# Altium PCB FLATSAT BCR.PcbDoc (part 1 of 3)
Units mm, origin at the board's own origin, x right, y up, seen from the top; angles counter-clockwise.
Board outline 180 x 90 mm, 4 copper layers (Top Layer, Internal Plane 1, Internal Plane 2, Bottom Layer); 220 components, 140 nets, 843 pads, 517 vias.
Unrouted connection lines stored in the file: 2.
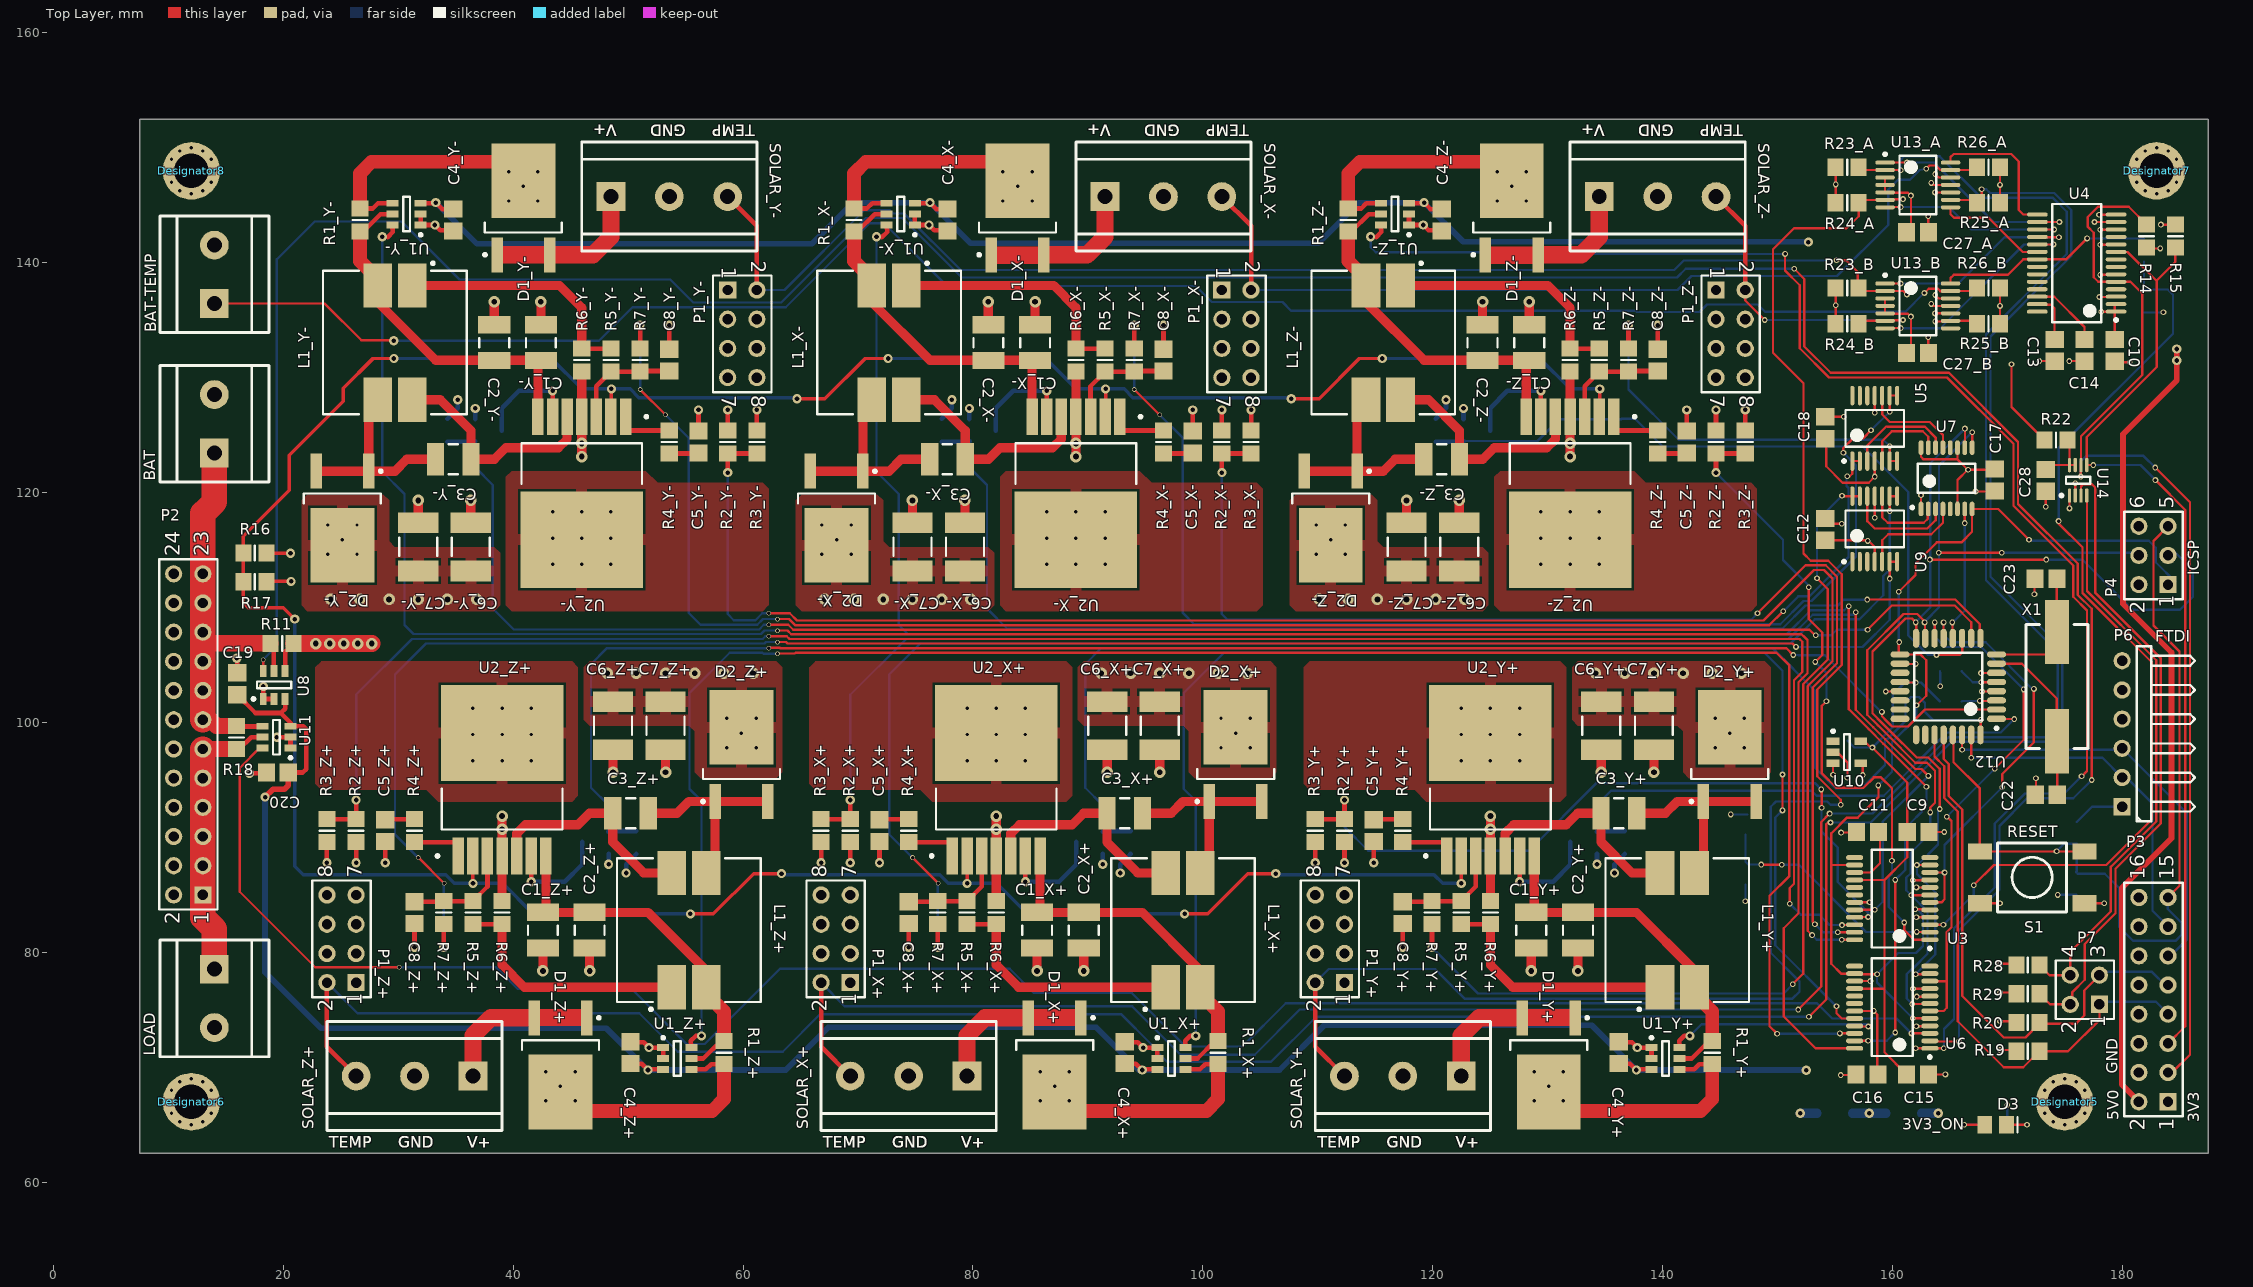
[diagram p0: Top Layer view]
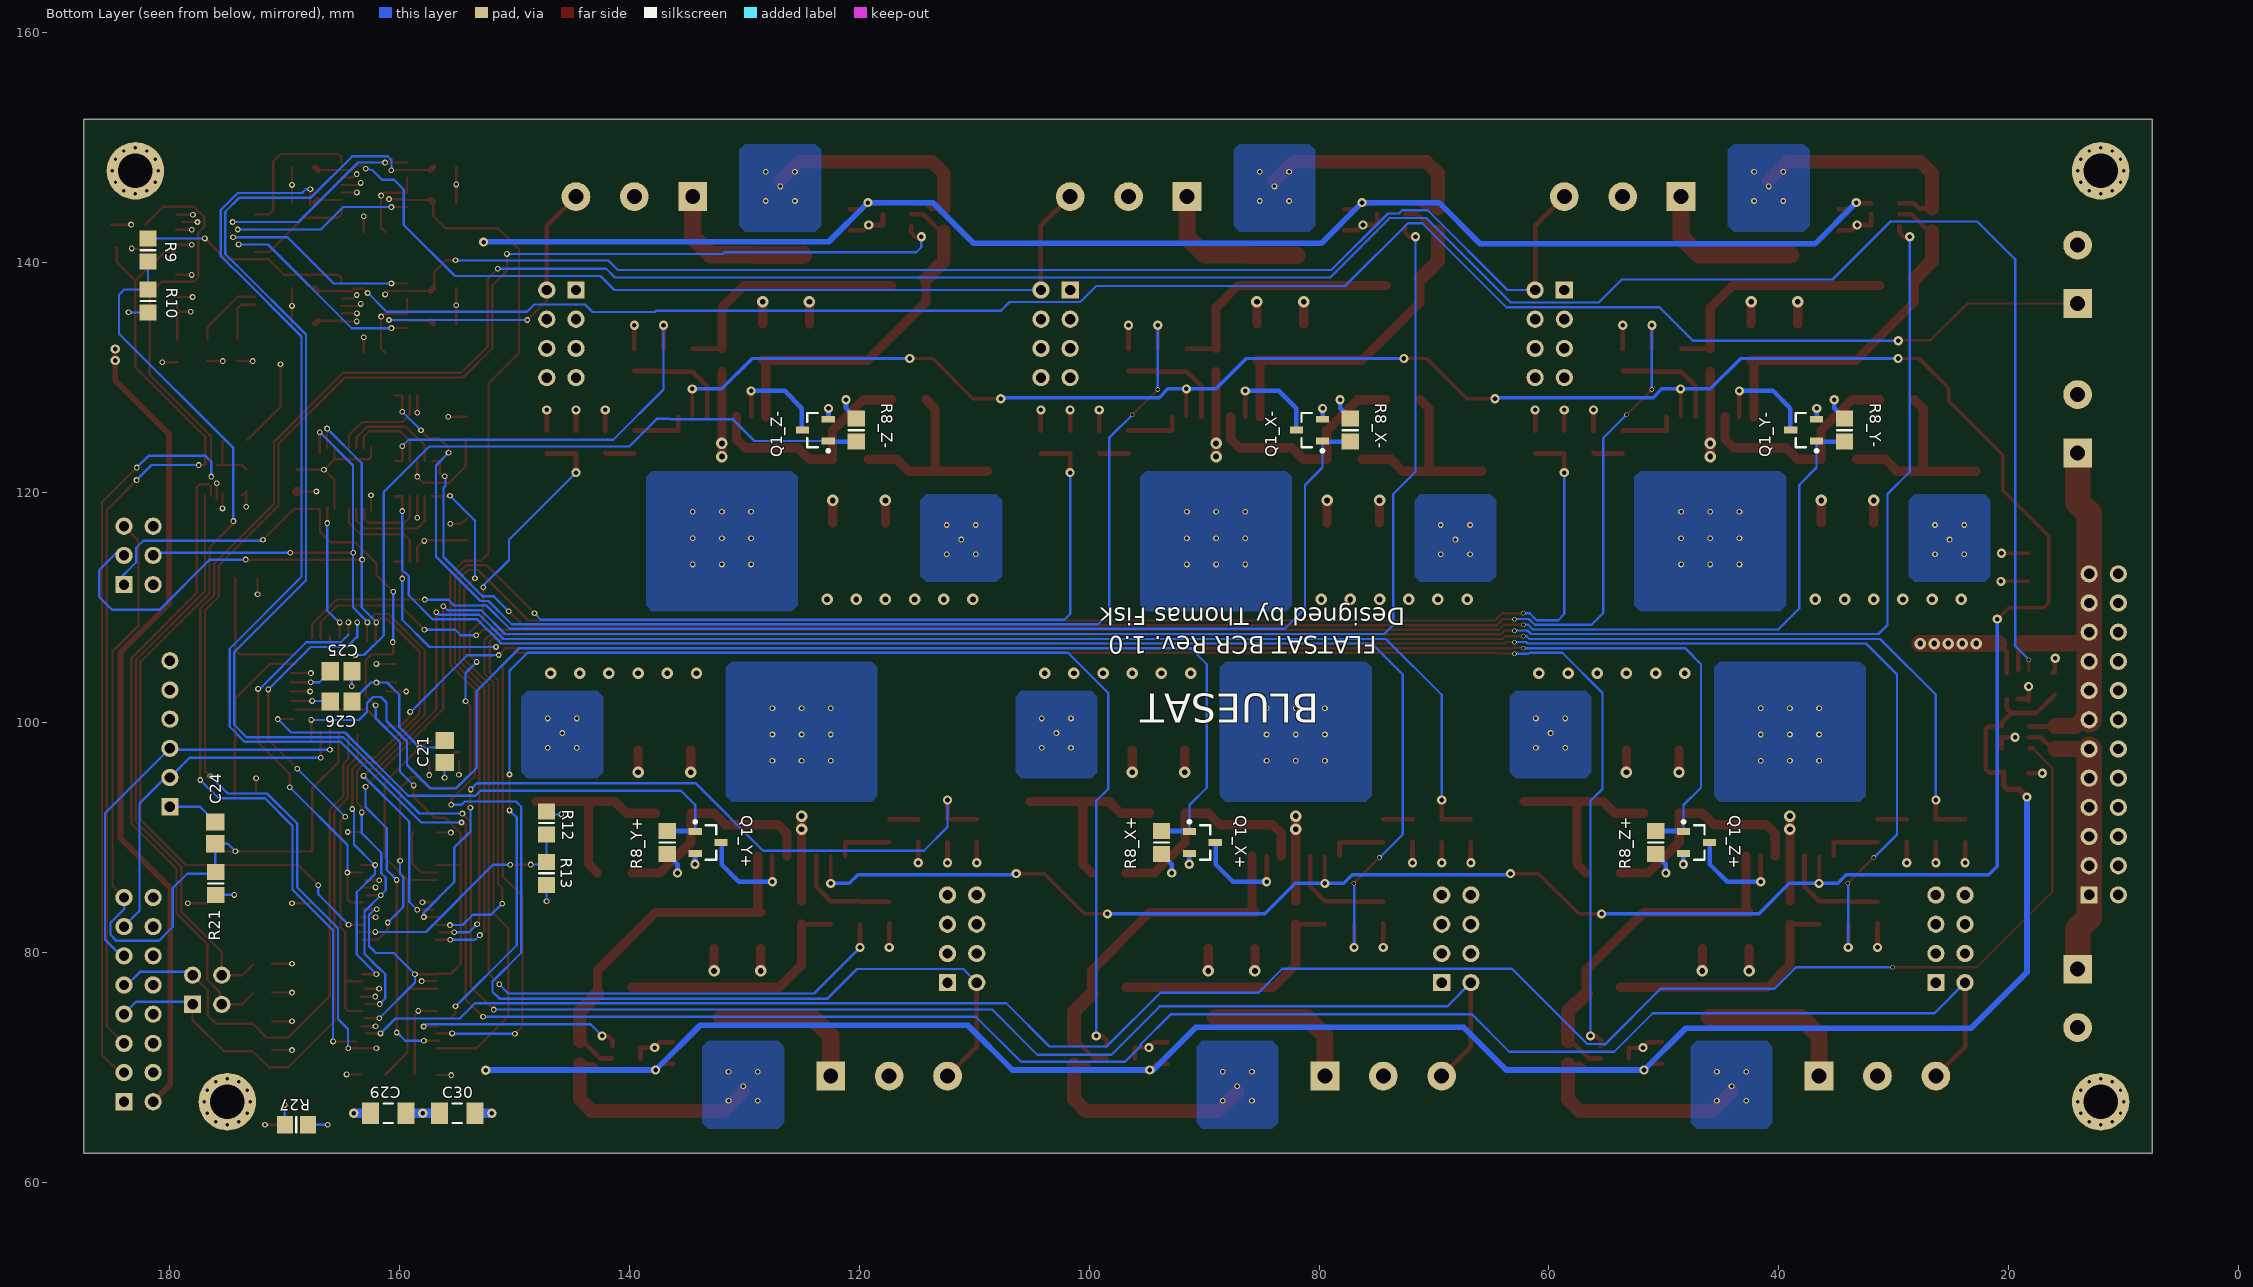
[diagram p1: Bottom Layer view, seen from below]
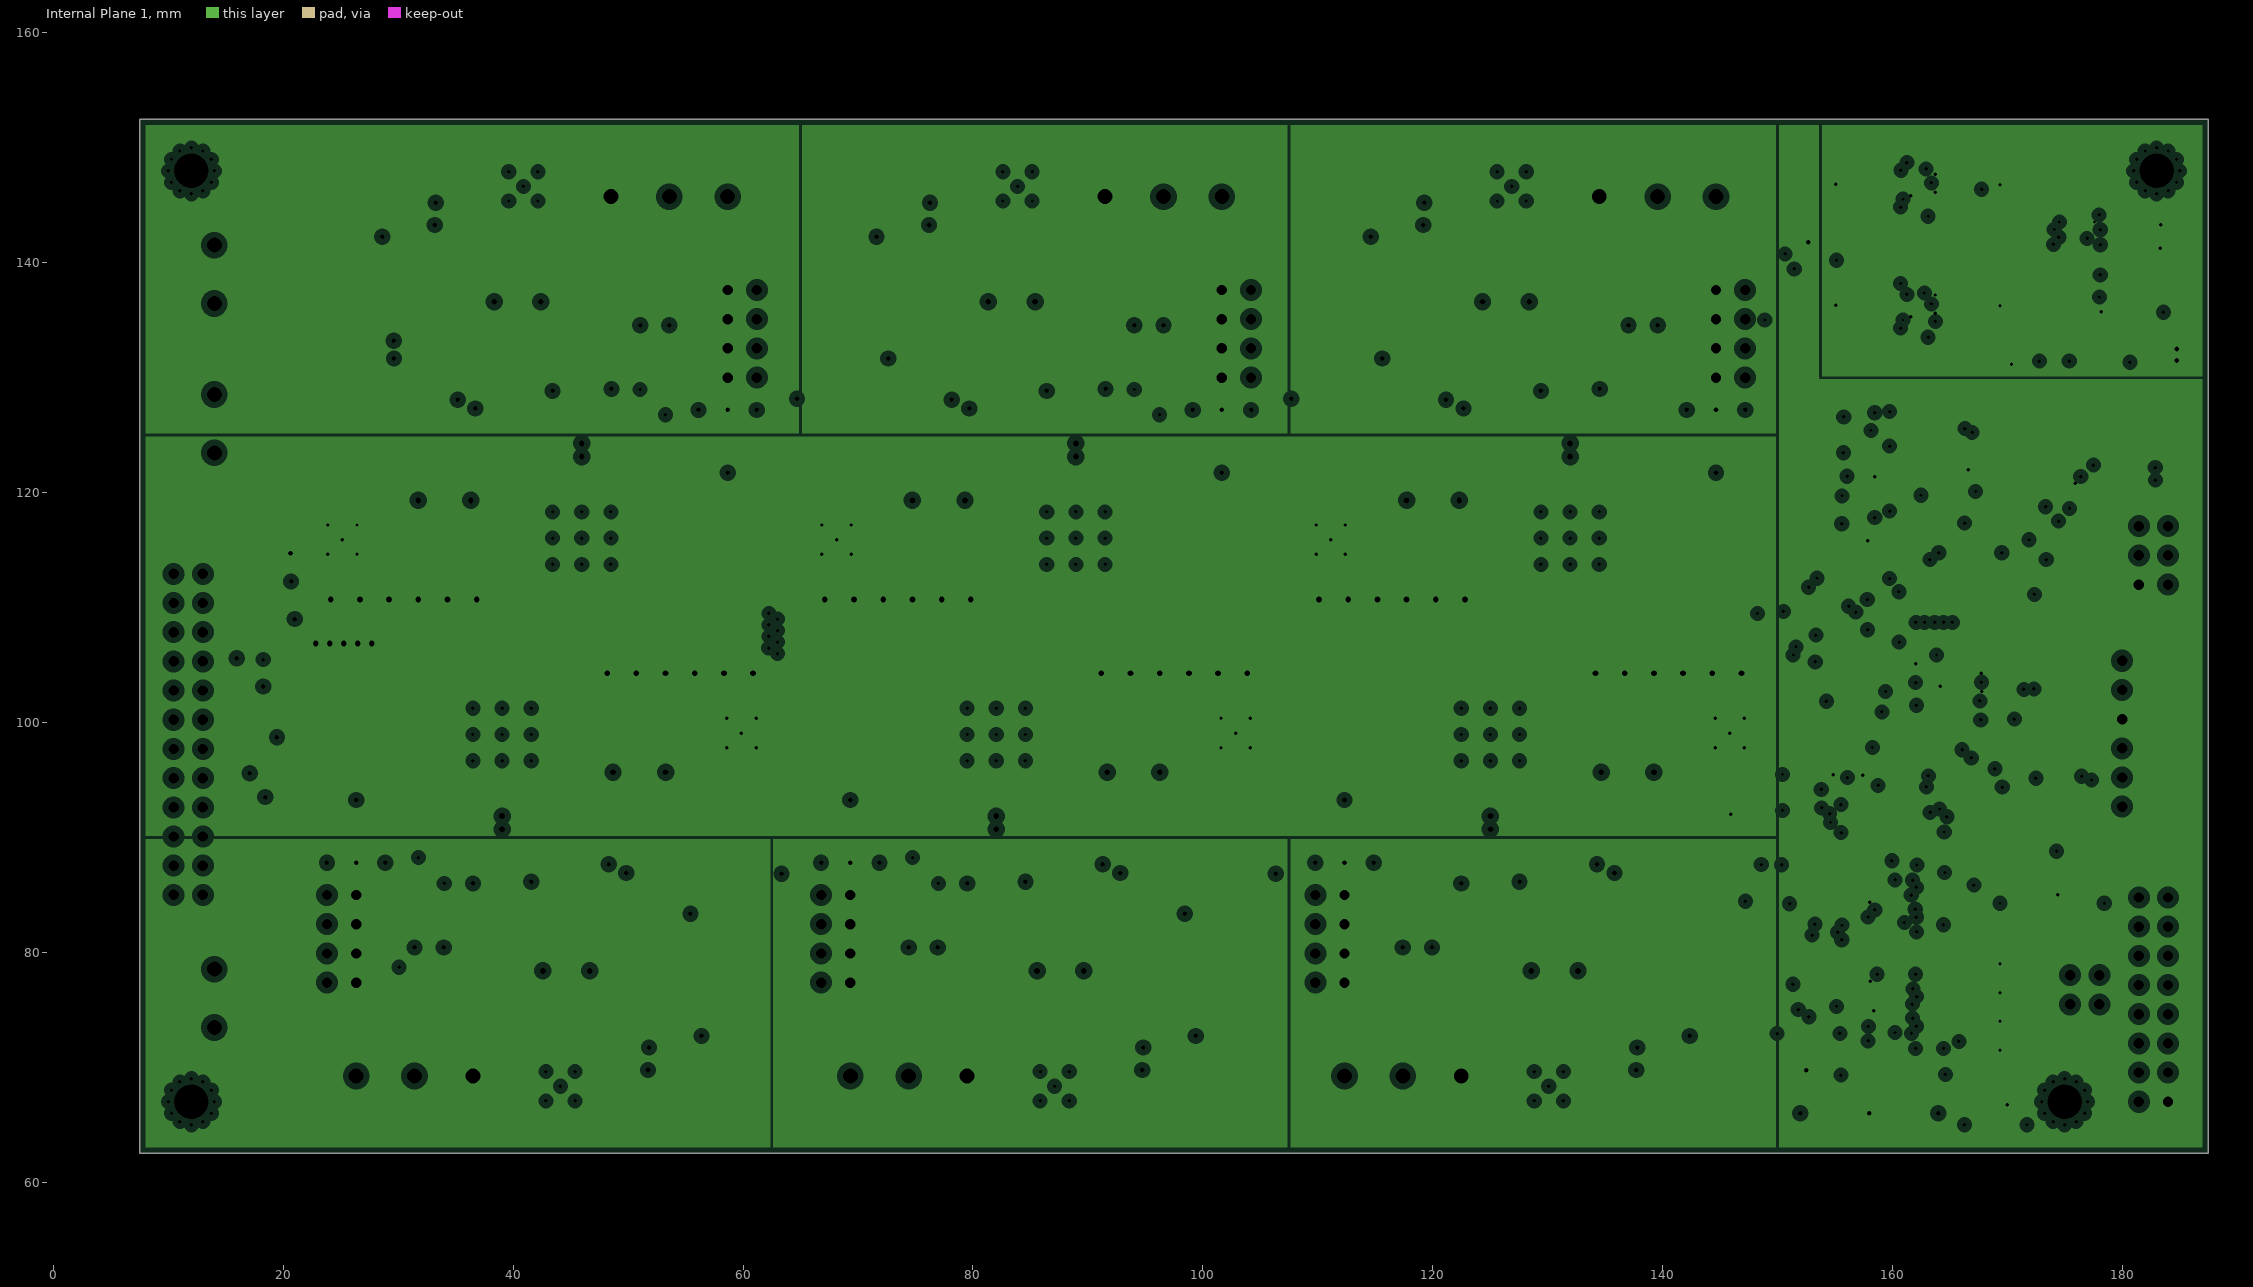
[diagram p2: Internal Plane 1, clearances drawn from the general rule]
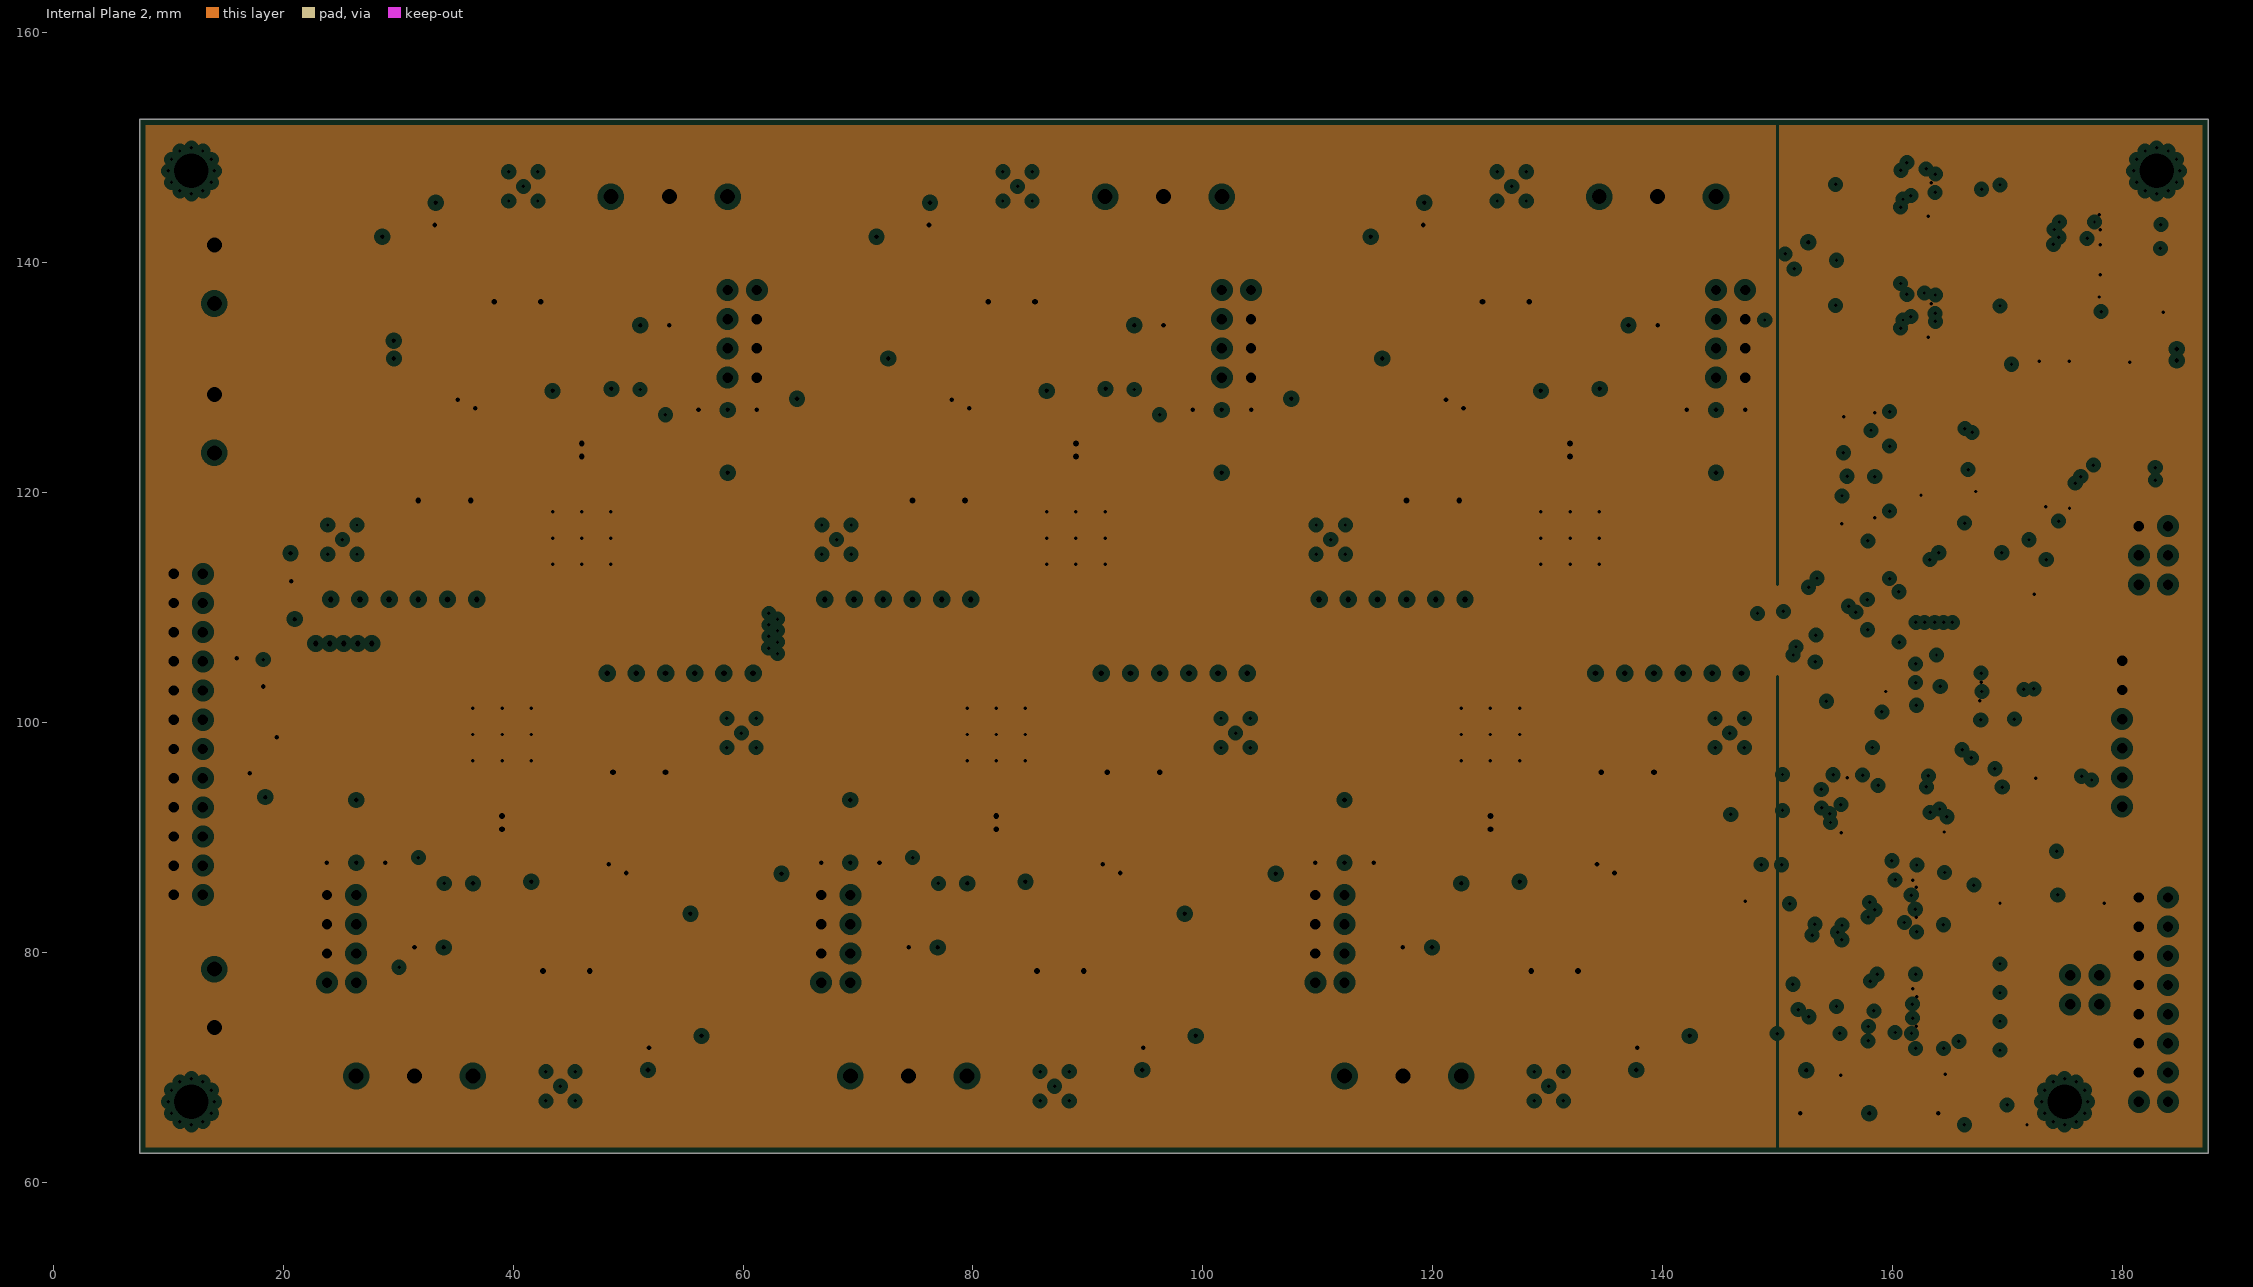
[diagram p3: Internal Plane 2, clearances drawn from the general rule]

## Layer stack, top to bottom
Top Layer: signal copper 0.0356
Dielectric: dielectric 0.32, FR-4, Dk 4.8
Internal Plane 1: plane copper 0.0356, net (Multiple Nets)
Dielectric: dielectric 0.32, FR-4, Dk 4.8
Internal Plane 2: plane copper 0.0356, net GND
Dielectric: dielectric 0.32, FR-4, Dk 4.8
Bottom Layer: signal copper 0.0356

## Board outline
7.5,62.5 187.5,62.5 187.5,152.5 7.5,152.5

## Design rules (kind name [scope] priority, off if disabled: settings)
AssemblyTestPointUsage [All] p1 off:
AssemblyTestpoint [All] p1 off: testpointundercomponent=TRUE minsize=1.016 maxsize=2.54 preferedsize=1.524 minholesize=0 maxholesize=1.016 preferedholesize=0.813 testpointgrid=0.025 usegrid=TRUE gridtolerance=0 allowsidetop=TRUE allowsidebottom=TRUE
Clearance [All] p1: gap=0.2
FabricationTestPointUsage [All] p1 off: valid=0 allowmultiple=FALSE
FabricationTestpoint [All] p1 off: side=3 testpointundercomponent=TRUE minsize=1.016 maxsize=2.54 preferedsize=1.524 minholesize=0 maxholesize=1.016 preferedholesize=0.813 testpointgrid=0.025 allowsidetop=TRUE allowsidebottom=TRUE usegrid=TRUE gridtolerance=0
MinimumSolderMaskSliver [All] p1 off: minsoldermaskwidth=0.254
PlaneClearance [All] p1: clearance=0.508
PlaneConnect PlaneConnect_1 [IsVia] p1: planeconnectstyle=Direct reliefexpansion=0.508 reliefentries=4 reliefconductorwidth=0.254 reliefairgap=0.254
PlaneConnect [All] p2: planeconnectstyle=Relief reliefexpansion=0.508 reliefentries=4 reliefconductorwidth=0.254 reliefairgap=0.254
PolygonConnect PolygonConnect_1 [IsVia] p1: connectstyle=Direct reliefconductorwidth=0.254 reliefentries=4 polygonreliefangle="90 Angle"
PolygonConnect [All] p2: connectstyle=Relief reliefconductorwidth=1 reliefentries=4 polygonreliefangle="90 Angle"
RoomDefinition Z- [InComponentClass('Z-')] p1: confinementstyle=ConfineIn formatcopy=TRUE lockcomponents=FALSE outline 150,154 107,154 107,107.5 150,107.5
RoomDefinition Z+ [InComponentClass('Z+')] p2: confinementstyle=ConfineIn formatcopy=TRUE lockcomponents=FALSE outline 21,61 64,61 64,107.5 21,107.5
RoomDefinition Y- [InComponentClass('Y-')] p3: confinementstyle=ConfineIn formatcopy=TRUE lockcomponents=FALSE outline 64,154 21,154 21,107.5 64,107.5
RoomDefinition Y+ [InComponentClass('Y+')] p4: confinementstyle=ConfineIn formatcopy=TRUE lockcomponents=FALSE outline 107,61 150,61 150,107.5 107,107.5
RoomDefinition X- [InComponentClass('X-')] p5: confinementstyle=ConfineIn formatcopy=TRUE lockcomponents=FALSE outline 107,154 64,154 64,107.5 107,107.5
RoomDefinition X+ [InComponentClass('X+')] p6: confinementstyle=ConfineIn formatcopy=TRUE lockcomponents=FALSE outline 64,61 107,61 107,107.5 64,107.5
RoomDefinition B [InComponentClass('B')] p7: confinementstyle=ConfineIn formatcopy=TRUE lockcomponents=FALSE outline 153.6,130.125 171,130.125 171,141.025 153.6,141.025
RoomDefinition A [InComponentClass('A')] p8: confinementstyle=ConfineIn formatcopy=TRUE lockcomponents=FALSE outline 153.6,140.65 171,140.65 171,151.55 153.6,151.55
RoutingVias [All] p1 off: holewidth=0.3 width=0.4 viastyle="Through Hole" minholewidth=0.711 minwidth=1.27 maxholewidth=0.711 maxwidth=1.27
SilkToSilkClearance [All] p1 off: silktosilkclearance=0.254
SilkscreenOverComponentPads [All] p1: minsilkscreentomaskgap=0.254
SolderMaskExpansion [All] p1: expansion=0.102
Width [All] p1: maxlimit=4 minlimit=0.2 preferedwidth=0.2
19 further rules are at their usual default settings.

## Classes and differential pairs
component class A: C27_A R23_A R24_A R25_A R26_A U13_A
component class B: C27_B R23_B R24_B R25_B R26_B U13_B
component class POWR0008_BCR_System: BAT BAT-TEMP C9 C10 C11 C12 C13 C14 C15 C16 C17 C18 C19 C20 C21 C22 C23 C24 C25 C26 C28 C29 C30 D3 LOAD P2 P3 P4 P6 P7 R9 R10 R11 R12 R13 R14 R15 R16 R17 R18 R19 R20 R21 R22 R27 R28 R29 S1 U3 U4 U5 U6 U7 U8 U9 U10 U11 U12 U14 X1
component class X+: C1_X+ C2_X+ C3_X+ C4_X+ C5_X+ C6_X+ C7_X+ C8_X+ D1_X+ D2_X+ L1_X+ P1_X+ Q1_X+ R1_X+ R2_X+ R3_X+ R4_X+ R5_X+ R6_X+ R7_X+ R8_X+ SOLAR_X+ U1_X+ U2_X+
component class X-: C1_X- C2_X- C3_X- C4_X- C5_X- C6_X- C7_X- C8_X- D1_X- D2_X- L1_X- P1_X- Q1_X- R1_X- R2_X- R3_X- R4_X- R5_X- R6_X- R7_X- R8_X- SOLAR_X- U1_X- U2_X-
component class Y+: C1_Y+ C2_Y+ C3_Y+ C4_Y+ C5_Y+ C6_Y+ C7_Y+ C8_Y+ D1_Y+ D2_Y+ L1_Y+ P1_Y+ Q1_Y+ R1_Y+ R2_Y+ R3_Y+ R4_Y+ R5_Y+ R6_Y+ R7_Y+ R8_Y+ SOLAR_Y+ U1_Y+ U2_Y+
component class Y-: C1_Y- C2_Y- C3_Y- C4_Y- C5_Y- C6_Y- C7_Y- C8_Y- D1_Y- D2_Y- L1_Y- P1_Y- Q1_Y- R1_Y- R2_Y- R3_Y- R4_Y- R5_Y- R6_Y- R7_Y- R8_Y- SOLAR_Y- U1_Y- U2_Y-
component class Z+: C1_Z+ C2_Z+ C3_Z+ C4_Z+ C5_Z+ C6_Z+ C7_Z+ C8_Z+ D1_Z+ D2_Z+ L1_Z+ P1_Z+ Q1_Z+ R1_Z+ R2_Z+ R3_Z+ R4_Z+ R5_Z+ R6_Z+ R7_Z+ R8_Z+ SOLAR_Z+ U1_Z+ U2_Z+
component class Z-: C1_Z- C2_Z- C3_Z- C4_Z- C5_Z- C6_Z- C7_Z- C8_Z- D1_Z- D2_Z- L1_Z- P1_Z- Q1_Z- R1_Z- R2_Z- R3_Z- R4_Z- R5_Z- R6_Z- R7_Z- R8_Z- SOLAR_Z- U1_Z- U2_Z-
channel class POWR0001_BCR_LT1513: X+ X- Y+ Y- Z+ Z-
channel class TELM0005_TempSenseHIGH_BCR: A B

## Components (designator, comment, footprint, x,y, rotation, side; value= is the part's Value field where it differs from the comment)
BAT "Screw Terminal" "5.05mm Terminal Block - 2" 14,126 r90 top
BAT-TEMP "Screw Terminal" "5.05mm Terminal Block - 2" 14,139 r90 top
C1_X+ "Cap" CAPC3225M 85.59,81.939 r270 top (schematic designator C1)
C1_X- "Cap" CAPC3225M 85.41,133.061 r90 top (schematic designator C1)
C1_Y+ "Cap" CAPC3225M 128.59,81.939 r270 top (schematic designator C1)
C1_Y- "Cap" CAPC3225M 42.41,133.061 r90 top (schematic designator C1)
C1_Z+ "Cap" CAPC3225M 42.59,81.939 r270 top (schematic designator C1)
C1_Z- "Cap" CAPC3225M 128.41,133.061 r90 top (schematic designator C1)
C2_X+ "Cap" CAPC3225M 89.654,81.939 r270 top (schematic designator C2)
C2_X- "Cap" CAPC3225M 81.346,133.061 r90 top (schematic designator C2)
C2_Y+ "Cap" CAPC3225M 132.654,81.939 r270 top (schematic designator C2)
C2_Y- "Cap" CAPC3225M 38.346,133.061 r90 top (schematic designator C2)
C2_Z+ "Cap" CAPC3225M 46.654,81.939 r270 top (schematic designator C2)
C2_Z- "Cap" CAPC3225M 124.346,133.061 r90 top (schematic designator C2)
C3_X+ "Cap" CAPC3225M 93.21,92.099 r180 top (schematic designator C3)
C3_X- "Cap" CAPC3225M 77.79,122.901 r0 top (schematic designator C3)
C3_Y+ "Cap" CAPC3225M 136.21,92.099 r180 top (schematic designator C3)
C3_Y- "Cap" CAPC3225M 34.79,122.901 r0 top (schematic designator C3)
C3_Z+ "Cap" CAPC3225M 50.21,92.099 r180 top (schematic designator C3)
C3_Z- "Cap" CAPC3225M 120.79,122.901 r0 top (schematic designator C3)
C4_X+ "Cap" CAPC2012M 93.21,71.271 r90 top (schematic designator C4)
C4_X- "Cap" CAPC2012M 77.79,143.729 r270 top (schematic designator C4)
C4_Y+ "Cap" CAPC2012M 136.21,71.271 r90 top (schematic designator C4)
C4_Y- "Cap" CAPC2012M 34.79,143.729 r270 top (schematic designator C4)
C4_Z+ "Cap" CAPC2012M 50.21,71.271 r90 top (schematic designator C4)
C4_Z- "Cap" CAPC2012M 120.79,143.729 r270 top (schematic designator C4)
C5_X+ "Cap" CAPC2012M 71.874,90.591 r270 top (schematic designator C5)
C5_X- "Cap" CAPC2012M 99.126,124.409 r90 top (schematic designator C5)
C5_Y+ "Cap" CAPC2012M 114.874,90.591 r270 top (schematic designator C5)
C5_Y- "Cap" CAPC2012M 56.126,124.409 r90 top (schematic designator C5)
C5_Z+ "Cap" CAPC2012M 28.874,90.591 r270 top (schematic designator C5)
C5_Z- "Cap" CAPC2012M 142.126,124.409 r90 top (schematic designator C5)
C6_X+ "Cap" CAPC4532M 91.686,99.719 r270 top (schematic designator C6)
C6_X- "Cap" CAPC4532M 79.314,115.281 r90 top (schematic designator C6)
C6_Y+ "Cap" CAPC4532M 134.686,99.719 r270 top (schematic designator C6)
C6_Y- "Cap" CAPC4532M 36.314,115.281 r90 top (schematic designator C6)
C6_Z+ "Cap" CAPC4532M 48.686,99.719 r270 top (schematic designator C6)
C6_Z- "Cap" CAPC4532M 122.314,115.281 r90 top (schematic designator C6)
C7_X+ "Cap" CAPC4532M 96.258,99.719 r270 top (schematic designator C7)
C7_X- "Cap" CAPC4532M 74.742,115.281 r90 top (schematic designator C7)
C7_Y+ "Cap" CAPC4532M 139.258,99.719 r270 top (schematic designator C7)
C7_Y- "Cap" CAPC4532M 31.742,115.281 r90 top (schematic designator C7)
C7_Z+ "Cap" CAPC4532M 53.258,99.719 r270 top (schematic designator C7)
C7_Z- "Cap" CAPC4532M 117.742,115.281 r90 top (schematic designator C7)
C8_X+ "Cap" CAPC2012M 74.414,83.463 r90 top (schematic designator C8)
C8_X- "Cap" CAPC2012M 96.586,131.537 r270 top (schematic designator C8)
C8_Y+ "Cap" CAPC2012M 117.414,83.463 r90 top (schematic designator C8)
C8_Y- "Cap" CAPC2012M 53.586,131.537 r270 top (schematic designator C8)
C8_Z+ "Cap" CAPC2012M 31.414,83.463 r90 top (schematic designator C8)
C8_Z- "Cap" CAPC2012M 139.586,131.537 r270 top (schematic designator C8)
C9 "Cap" CAPC2012M 162.25,90.475 r180 top
C10 "Cap" CAPC2012M 179.35,132.375 r90 top
C11 "Cap" CAPC2012M 157.85,90.475 r0 top
C12 "Cap" CAPC2012M 154.175,116.8 r270 top
C13 "Cap" CAPC2012M 174.125,132.375 r270 top
C14 "Cap" CAPC2012M 176.725,132.375 r90 top
C15 "Cap" CAPC2012M 162.2,69.375 r180 top
C16 "Cap" CAPC2012M 157.8,69.375 r0 top
C17 "Cap" CAPC2012M 168.925,121.1 r90 top
C18 "Cap" CAPC2012M 154.175,125.65 r270 top
C19 "Cap" CAPC2012M 15.975,103.375 r90 top
C20 "Cap" CAPC2012M 19.475,95.65 r180 top
C21 "Cap" CAPC2012M 156.1,97.475 r90 bottom
C22 "Cap" CAPC2012M 173.4,93.725 r0 top
C23 "Cap" CAPC2012M 173.375,112.525 r0 top
C24 "Cap" CAPC2012M 176.05,90.4 r270 bottom
C25 "Cap" CAPC2012M 165.1,104.45 r180 bottom
C26 "Cap" CAPC2012M 165.1,101.825 r0 bottom
C27_A "Cap" CAPC2012M 162.2,142.675 r180 top (schematic designator C27)
C27_B "Cap" CAPC2012M 162.2,132.15 r180 top (schematic designator C27)
C28 "Cap" CAPC2012M 173.35,121.075 r90 top
C29 "Cap" CAPC3216M 161,66 r180 bottom (schematic designator C31)
C30 "Cap" CAPC3216M 155,66 r0 bottom (schematic designator C32)
D1_X+ "MBRD340G" TO229P990X238-3N 87.114,70.255 r270 top (schematic designator D1)
D1_X- "MBRD340G" TO229P990X238-3N 83.886,144.745 r90 top (schematic designator D1)
D1_Y+ "MBRD340G" TO229P990X238-3N 130.114,70.255 r270 top (schematic designator D1)
D1_Y- "MBRD340G" TO229P990X238-3N 40.886,144.745 r90 top (schematic designator D1)
D1_Z+ "MBRD340G" TO229P990X238-3N 44.114,70.255 r270 top (schematic designator D1)
D1_Z- "MBRD340G" TO229P990X238-3N 126.886,144.745 r90 top (schematic designator D1)
D2_X+ "MBRD340G" TO229P990X238-3N 102.862,97.179 r90 top (schematic designator D2)
D2_X- "MBRD340G" TO229P990X238-3N 68.138,117.821 r270 top (schematic designator D2)
D2_Y+ "MBRD340G" TO229P990X238-3N 145.862,97.179 r90 top (schematic designator D2)
D2_Y- "MBRD340G" TO229P990X238-3N 25.138,117.821 r270 top (schematic designator D2)
D2_Z+ "MBRD340G" TO229P990X238-3N 59.862,97.179 r90 top (schematic designator D2)
D2_Z- "MBRD340G" TO229P990X238-3N 111.138,117.821 r270 top (schematic designator D2)
D3 "0805 LED" CD2012-0805 169,65 r0 top
Designator5 "Comment" HOLE3 175,67 r0 top
Designator6 "Comment" HOLE3 12,67 r0 top
Designator7 "Comment" HOLE3 183,148 r0 top
Designator8 "Comment" HOLE3 12,148 r0 top
L1_X+ "DRQ125 Dual Inductor" DRQ125 98.29,81.939 r90 top (schematic designator L1)
L1_X- "DRQ125 Dual Inductor" DRQ125 72.71,133.061 r270 top (schematic designator L1)
L1_Y+ "DRQ125 Dual Inductor" DRQ125 141.29,81.939 r90 top (schematic designator L1)
L1_Y- "DRQ125 Dual Inductor" DRQ125 29.71,133.061 r270 top (schematic designator L1)
L1_Z+ "DRQ125 Dual Inductor" DRQ125 55.29,81.939 r90 top (schematic designator L1)
L1_Z- "DRQ125 Dual Inductor" DRQ125 115.71,133.061 r270 top (schematic designator L1)
LOAD "Screw Terminal" "5.05mm Terminal Block - 2" 14,76 r270 top
P1_X+ "Header 4X2" HDR2X4 69.334,77.367 r90 top (schematic designator P1)
P1_X- "Header 4X2" HDR2X4 101.666,137.633 r270 top (schematic designator P1)
P1_Y+ "Header 4X2" HDR2X4 112.334,77.367 r90 top (schematic designator P1)
P1_Y- "Header 4X2" HDR2X4 58.666,137.633 r270 top (schematic designator P1)
P1_Z+ "Header 4X2" HDR2X4 26.334,77.367 r90 top (schematic designator P1)
P1_Z- "Header 4X2" HDR2X4 144.666,137.633 r270 top (schematic designator P1)
P2 "Header 12X2" HDR2X12 13,85 r90 top
P3 "Header 8X2" HDR2X8 184,67 r90 top
P4 "ICSP - Header 3x2" HDR2X3 184,112 r90 top
P6 "FTDI - Header 6H" HDR1X6H 180,92.675 r90 top
P7 "Header 2X2" HDR2X2 178.025,75.475 r90 top (schematic designator JP1)
Q1_X+ "IRLML2803PBF" SOT-23_N 90.162,89.559 r180 bottom (schematic designator Q1)
Q1_X- "IRLML2803PBF" SOT-23_N 80.838,125.441 r0 bottom (schematic designator Q1)
Q1_Y+ "IRLML2803PBF" SOT-23_N 133.162,89.559 r180 bottom (schematic designator Q1)
Q1_Y- "IRLML2803PBF" SOT-23_N 37.838,125.441 r0 bottom (schematic designator Q1)
Q1_Z+ "IRLML2803PBF" SOT-23_N 47.162,89.559 r180 bottom (schematic designator Q1)
Q1_Z- "IRLML2803PBF" SOT-23_N 123.838,125.441 r0 bottom (schematic designator Q1)
R1_X+ "Res1" RESC2012M 101.338,71.271 r270 top (schematic designator R1)
R1_X- "Res1" RESC2012M 69.662,143.729 r90 top (schematic designator R1)
R1_Y+ "Res1" RESC2012M 144.338,71.271 r270 top (schematic designator R1)
R1_Y- "Res1" RESC2012M 26.662,143.729 r90 top (schematic designator R1)
R1_Z+ "Res1" RESC2012M 58.338,71.271 r270 top (schematic designator R1)
R1_Z- "Res1" RESC2012M 112.662,143.729 r90 top (schematic designator R1)
R2_X+ "Res1" RESC2012M 69.334,90.591 r90 top (schematic designator R2)
R2_X- "Res1" RESC2012M 101.666,124.409 r270 top (schematic designator R2)
R2_Y+ "Res1" RESC2012M 112.334,90.591 r90 top (schematic designator R2)
R2_Y- "Res1" RESC2012M 58.666,124.409 r270 top (schematic designator R2)
R2_Z+ "Res1" RESC2012M 26.334,90.591 r90 top (schematic designator R2)
R2_Z- "Res1" RESC2012M 144.666,124.409 r270 top (schematic designator R2)
R3_X+ "Res1" RESC2012M 66.794,90.591 r270 top (schematic designator R3)
R3_X- "Res1" RESC2012M 104.206,124.409 r90 top (schematic designator R3)
R3_Y+ "Res1" RESC2012M 109.794,90.591 r270 top (schematic designator R3)
R3_Y- "Res1" RESC2012M 61.206,124.409 r90 top (schematic designator R3)
R3_Z+ "Res1" RESC2012M 23.794,90.591 r270 top (schematic designator R3)
R3_Z- "Res1" RESC2012M 147.206,124.409 r90 top (schematic designator R3)
R4_X+ "Res1" RESC2012M 74.414,90.591 r90 top (schematic designator R4)
R4_X- "Res1" RESC2012M 96.586,124.409 r270 top (schematic designator R4)
R4_Y+ "Res1" RESC2012M 117.414,90.591 r90 top (schematic designator R4)
R4_Y- "Res1" RESC2012M 53.586,124.409 r270 top (schematic designator R4)
R4_Z+ "Res1" RESC2012M 31.414,90.591 r90 top (schematic designator R4)
R4_Z- "Res1" RESC2012M 139.586,124.409 r270 top (schematic designator R4)
R5_X+ "Res1" RESC2012M 79.494,83.463 r90 top (schematic designator R5)
R5_X- "Res1" RESC2012M 91.506,131.537 r270 top (schematic designator R5)
R5_Y+ "Res1" RESC2012M 122.494,83.463 r90 top (schematic designator R5)
R5_Y- "Res1" RESC2012M 48.506,131.537 r270 top (schematic designator R5)
R5_Z+ "Res1" RESC2012M 36.494,83.463 r90 top (schematic designator R5)
R5_Z- "Res1" RESC2012M 134.506,131.537 r270 top (schematic designator R5)
R6_X+ "Res1" RESC2012M 82.034,83.463 r270 top (schematic designator R6)
R6_X- "Res1" RESC2012M 88.966,131.537 r90 top (schematic designator R6)
R6_Y+ "Res1" RESC2012M 125.034,83.463 r270 top (schematic designator R6)
R6_Y- "Res1" RESC2012M 45.966,131.537 r90 top (schematic designator R6)
R6_Z+ "Res1" RESC2012M 39.034,83.463 r270 top (schematic designator R6)
R6_Z- "Res1" RESC2012M 131.966,131.537 r90 top (schematic designator R6)
R7_X+ "Res1" RESC2012M 76.954,83.463 r270 top (schematic designator R7)
R7_X- "Res1" RESC2012M 94.046,131.537 r90 top (schematic designator R7)
R7_Y+ "Res1" RESC2012M 119.954,83.463 r270 top (schematic designator R7)
R7_Y- "Res1" RESC2012M 51.046,131.537 r90 top (schematic designator R7)
R7_Z+ "Res1" RESC2012M 33.954,83.463 r270 top (schematic designator R7)
R7_Z- "Res1" RESC2012M 137.046,131.537 r90 top (schematic designator R7)
R8_X+ "Res1" RESC2012M 93.718,89.559 r270 bottom (schematic designator R8)
R8_X- "Res1" RESC2012M 77.282,125.441 r90 bottom (schematic designator R8)
R8_Y+ "Res1" RESC2012M 136.718,89.559 r270 bottom (schematic designator R8)
R8_Y- "Res1" RESC2012M 34.282,125.441 r90 bottom (schematic designator R8)
R8_Z+ "Res1" RESC2012M 50.718,89.559 r270 bottom (schematic designator R8)
R8_Z- "Res1" RESC2012M 120.282,125.441 r90 bottom (schematic designator R8)
R9 "Res1" RESC2012M 181.9,141.1 r90 bottom
R10 "Res1" RESC2012M 181.9,136.675 r270 bottom
R11 "0805 Resistor" RESC2012M 19.9,106.875 r180 top
R12 "Res1" RESC2012M 147.225,91.25 r270 bottom
R13 "Res1" RESC2012M 147.225,86.875 r270 bottom
R14 "Res1" RESC2012M 182.125,142.325 r90 top
R15 "Res1" RESC2012M 184.65,142.325 r270 top
R16 "Res1" RESC2012M 17.525,114.75 r0 top
R17 "Res1" RESC2012M 17.525,112.25 r180 top
R18 "0805 Resistor" RESC2012M 15.925,98.7 r90 top
R19 "Res1" RESC2012M 171.8,71.4 r0 top
R20 "Res1" RESC2012M 171.8,73.9 r0 top
R21 "Res1" RESC2012M 176,86 r90 bottom
R22 "Res1" RESC2012M 174.25,124.575 r0 top
R23_A "Res1" RESC2012M 156.075,148.325 r0 top (schematic designator R23)
R23_B "Res1" RESC2012M 156.075,137.8 r0 top (schematic designator R23)
R24_A "Res1" RESC2012M 156.075,145.225 r0 top (schematic designator R24)
R24_B "Res1" RESC2012M 156.075,134.7 r0 top (schematic designator R24)
R25_A "Res1" RESC2012M 168.375,145.225 r180 top (schematic designator R25)
R25_B "Res1" RESC2012M 168.375,134.7 r180 top (schematic designator R25)
R26_A "Res1" RESC2012M 168.375,148.325 r180 top (schematic designator R26)
R26_B "Res1" RESC2012M 168.375,137.8 r180 top (schematic designator R26)
R27 "Res1" RESC2012M 169,65 r180 bottom
R28 "Res1" RESC2012M 171.8,78.9 r180 top
R29 "Res1" RESC2012M 171.8,76.4 r180 top
S1 "SW-PB" "RESET SWITCH" 172.175,86.525 r90 top
SOLAR_X+ "Panel Connector (Screwterm)" "5.05mm Terminal Block - 3" 76.954,69.239 r180 top (schematic designator SOLAR)
SOLAR_X- "Panel Connector (Screwterm)" "5.05mm Terminal Block - 3" 94.046,145.761 r0 top (schematic designator SOLAR)
SOLAR_Y+ "Panel Connector (Screwterm)" "5.05mm Terminal Block - 3" 119.954,69.239 r180 top (schematic designator SOLAR)
SOLAR_Y- "Panel Connector (Screwterm)" "5.05mm Terminal Block - 3" 51.046,145.761 r0 top (schematic designator SOLAR)
SOLAR_Z+ "Panel Connector (Screwterm)" "5.05mm Terminal Block - 3" 33.954,69.239 r180 top (schematic designator SOLAR)
SOLAR_Z- "Panel Connector (Screwterm)" "5.05mm Terminal Block - 3" 137.046,145.761 r0 top (schematic designator SOLAR)
U1_X+ "ADM4073" SOT95P285X145-6N 97.274,70.763 r0 top (schematic designator U1)
U1_X- "ADM4073" SOT95P285X145-6N 73.726,144.237 r180 top (schematic designator U1)
U1_Y+ "ADM4073" SOT95P285X145-6N 140.274,70.763 r0 top (schematic designator U1)
U1_Y- "ADM4073" SOT95P285X145-6N 30.726,144.237 r180 top (schematic designator U1)
U1_Z+ "ADM4073" SOT95P285X145-6N 54.274,70.763 r0 top (schematic designator U1)
U1_Z- "ADM4073" SOT95P285X145-6N 116.726,144.237 r180 top (schematic designator U1)
U2_X+ "LT1513-2" TO152P1396X238-8N 82.034,94.639 r90 top (schematic designator U2)
U2_X- "LT1513-2" TO152P1396X238-8N 88.966,120.361 r270 top (schematic designator U2)
U2_Y+ "LT1513-2" TO152P1396X238-8N 125.034,94.639 r90 top (schematic designator U2)
U2_Y- "LT1513-2" TO152P1396X238-8N 45.966,120.361 r270 top (schematic designator U2)
U2_Z+ "LT1513-2" TO152P1396X238-8N 39.034,94.639 r90 top (schematic designator U2)
U2_Z- "LT1513-2" TO152P1396X238-8N 131.966,120.361 r270 top (schematic designator U2)
U3 "LTC1598L" LTC1598L 160,84.675 r180 top
U4 "MAX127" "SSOP28 - MAX127" 176.05,139.975 r180 top
U5 "LMV554MT" MTC14_N 158.475,125.6 r90 top
U6 "LTC1598L" LTC1598L 160,75.225 r180 top
U7 "LTC1660IGN" LTC1660 164.725,121.25 r90 top
U8 "ADM4073" SOT95P285X145-6N 19.2,103.275 r90 top
U9 "LMV554MT" MTC14_N 158.475,116.85 r90 top
U10 "LM4120AIM5-2.0" MF05A_N 156.05,97.425 r0 top
U11 "ADM4073" SOT95P285X145-6N 19.4,98.725 r180 top
U12 "ATmega328P" 32A_N 164.875,103.125 r180 top
U13_A "MAX4378HAUD" TSOP65P640-14AN 162.225,146.775 r0 top (schematic designator U13)
U13_B "MAX4378HAUD" TSOP65P640-14AN 162.225,136.25 r0 top (schematic designator U13)
U14 "PCA9306DCU" TSSOP50P310X90-8N 176.175,121.075 r90 top
X1 "16MHz" "HC49 - No border" 174.325,103.125 r90 top

## Footprints (in the part's own frame and the unit in brackets; to place one, negate y for a bottom-side part, rotate by r counter-clockwise, add the part's x,y. Pads: shape width x height; smd on the part's side, far side on the other; paste and mask are expansions set on the pad)
"5.05mm Terminal Block - 2" [mm]
  rect 2.5x2.5 hole 1.3: 1(-2.54,0)
  round 2.5 hole 1.3: 2(2.54,0)
  silkscreen extent -5.08,-4.75 5.08,4.75
"5.05mm Terminal Block - 3" [mm]
  rect 2.5x2.5 hole 1.3: 1(-2.54,0)
  round 2.5 hole 1.3: 2(2.54,0) 3(7.62,0)
  silkscreen extent -5.08,-4.75 10.16,4.75
32A_N [mm] "Thin QFP, 32-Leads, Body 7x7mm, Pitch 0.8mm, IPC Medium Density"
  oval 1.65x0.55 smd: 1(-4.2,2.8) 2(-4.2,2) 3(-4.2,1.2) 4(-4.2,0.4) 5(-4.2,-0.4) 6(-4.2,-1.2) 7(-4.2,-2) 8(-4.2,-2.8) 17(4.2,-2.8) 18(4.2,-2) 19(4.2,-1.2) 20(4.2,-0.4) 21(4.2,0.4) 22(4.2,1.2) 23(4.2,2) 24(4.2,2.8)
  oval 0.55x1.65 smd: 9(-2.8,-4.2) 10(-2,-4.2) 11(-1.2,-4.2) 12(-0.4,-4.2) 13(0.4,-4.2) 14(1.2,-4.2) 15(2,-4.2) 16(2.8,-4.2) 25(2.8,4.2) 26(2,4.2) 27(1.2,4.2) 28(0.4,4.2) 29(-0.4,4.2) 30(-1.2,4.2) 31(-2,4.2) 32(-2.8,4.2)
  silkscreen extent -4.33,-2.95 2.95,3.75, body extent -3.5,-3.5 3.5,3.5, height 1.2
CAPC2012M [mm] "Chip Capacitor, Body 2.0x1.3mm, IPC Low Density"
  rect 1.5x1.6 smd: 1(-0.95,0) 2(0.95,0)
  body extent -1.1,-0.72 1.1,0.72, height 1.1
CAPC3216M [mm] "Chip Capacitor, Body 3.2x1.6mm, IPC Low Density"
  rect 1.5x1.9 smd: 1(-1.55,0) 2(1.55,0)
  silkscreen extent -0.4,-0.85 0.4,0.85, body extent -1.7,-0.9 1.7,0.9, height 1.35
CAPC3225M [mm] "Chip Capacitor, Body 3.2x2.5mm, IPC Low Density"
  rect 1.5x2.8 smd: 1(-1.55,0) 2(1.55,0)
  silkscreen extent -0.4,-1.3 0.4,1.3, body extent -1.7,-1.35 1.7,1.35, height 1.35
CAPC4532M [mm] "Chip Capacitor, Body 4.5x3.2mm, IPC Low Density"
  rect 1.8x3.5 smd: 1(-2.1,0) 2(2.1,0)
  silkscreen extent -0.8,-1.65 0.8,1.65, body extent -2.4,-1.7 2.4,1.7, height 1.35
CD2012-0805 [mm] "Chip Diode; Body 2.0 x 1.3 mm (LxW typ)"
  rect 1.3x1.5 smd: 1(-0.95,0) 2(0.95,0)
  silkscreen extent 1.9,-0.65 1.9,0.65
DRQ125 [mm]
  rect 3.85x2.5 smd: 1(-4.975,1.5) 2(-4.975,-1.5) 3(4.975,-1.5) 4(4.975,1.5)
  silkscreen extent -7.02,-6.25 6.25,6.25, body extent -6.25,-6.25 6.25,6.25, height 6
"HC49 - No border" [mm] "Crystal Oscilator"
  rect 5.6x2.1 smd: 1(-4.75,0) 2(4.75,0)
  silkscreen extent -5.4,-2.7 5.4,2.7, body extent -5.4,-2.7 5.4,2.7, height 4.2
HDR1X6H [mm] "Connector; Header; 6 Position; Right Angle"
  rect 1.5x1.5 hole 0.9: 1(0,0)
  round 1.5 hole 0.9: 2(2.54,0) 3(5.08,0) 4(7.62,0) 5(10.16,0) 6(12.7,0)
  silkscreen extent -1.27,-6.35 13.97,-1.27
HDR2X2 [mm] "Connector; Header; 2x2 Position"
  rect 1.5x1.5 hole 0.9: 1(0,0)
  round 1.5 hole 0.9: 2(0,2.54) 3(2.54,0) 4(2.54,2.54)
  silkscreen extent -1.27,-1.27 3.81,3.81
HDR2X3 [mm] "Connector; Header; 3x2 Position"
  rect 1.5x1.5 hole 0.9: 1(0,0)
  round 1.5 hole 0.9: 2(0,2.54) 3(2.54,0) 4(2.54,2.54) 5(5.08,0) 6(5.08,2.54)
  silkscreen extent -1.27,-1.27 6.35,3.81
HDR2X4 [mm] "Connector; Header; 4x2 Position"
  rect 1.5x1.5 hole 0.9: 1(0,0)
  round 1.5 hole 0.9: 2(0,2.54) 3(2.54,0) 4(2.54,2.54) 5(5.08,0) 6(5.08,2.54) 7(7.62,0) 8(7.62,2.54)
  silkscreen extent -1.27,-1.27 8.89,3.81
HDR2X8 [mm] "Connector; Header; 8x2 Position"
  rect 1.5x1.5 hole 0.9: 1(0,0)
  round 1.5 hole 0.9: 2(0,2.54) 3(2.54,0) 4(2.54,2.54) 5(5.08,0) 6(5.08,2.54) 7(7.62,0) 8(7.62,2.54) 9(10.16,0) 10(10.16,2.54) 11(12.7,0) 12(12.7,2.54) 13(15.24,0) 14(15.24,2.54) 15(17.78,0) 16(17.78,2.54)
  silkscreen extent -1.27,-1.27 19.05,3.81
HDR2X12 [mm] "Connector; Header; 12x2 Position"
  rect 1.5x1.5 hole 0.9: 1(0,0)
  round 1.5 hole 0.9: 2(0,2.54) 3(2.54,0) 4(2.54,2.54) 5(5.08,0) 6(5.08,2.54) 7(7.62,0) 8(7.62,2.54) 9(10.16,0) 10(10.16,2.54) 11(12.7,0) 12(12.7,2.54) 13(15.24,0) 14(15.24,2.54) 15(17.78,0) 16(17.78,2.54) 17(20.32,0) 18(20.32,2.54) 19(22.86,0) 20(22.86,2.54) 21(25.4,0) 22(25.4,2.54) 23(27.94,0) 24(27.94,2.54)
  silkscreen extent -1.27,-1.27 29.21,3.81
HOLE3 [mm]
  round 1 hole 0.3: 1(-2,0) 1(-1.732,-1) 1(-1.732,1) 1(-1,-1.732) 1(-1,1.732) 1(0,-2) 1(0,2) 1(1,-1.732) 1(1,1.732) 1(1.732,-1) 1(1.732,1) 1(2,0)
  round 5 hole 3: 1(0,0)
LTC1598L [mm]
  oval 1.5x0.42 smd: 1(-3.275,3.575) 2(-3.275,2.925) 3(-3.275,2.275) 4(-3.275,1.625) 5(-3.275,0.975) 6(-3.275,0.325) 7(-3.275,-0.325) 8(-3.275,-0.975) 9(-3.275,-1.625) 10(-3.275,-2.275) 11(-3.275,-2.925) 12(-3.275,-3.575) 13(3.275,-3.575) 14(3.275,-2.925) 15(3.275,-2.275) 16(3.275,-1.625) 17(3.275,-0.975) 18(3.275,-0.325) 19(3.275,0.325) 20(3.275,0.975) 21(3.275,1.625) 22(3.275,2.275) 23(3.275,2.925) 24(3.275,3.575)
  silkscreen extent -3.4,-4.25 1.78,4.46, body extent -2.8,-4.25 2.8,4.25, height 2
LTC1660 [mil]
  oval 50x16.5 smd: 1(-105,87.5) 2(-105,62.5) 3(-105,37.5) 4(-105,12.5) 5(-105,-12.5) 6(-105,-37.5) 7(-105,-62.5) 8(-105,-87.5) 9(105,-87.5) 10(105,-62.5) 11(105,-37.5) 12(105,-12.5) 13(105,12.5) 14(105,37.5) 15(105,62.5) 16(105,87.5)
  silkscreen extent -105,-98 50,122, body extent -79,-98 79,98, height 69
MF05A_N [mm] "SOT23, 5-Leads, Body 2.9x1.6mm, Pitch 0.95mm, Lead Span 2.8mm, IPC Medium Density"
  rect 1.1x0.65 smd: 1(-1.2,0.95) 2(-1.2,0) 3(-1.2,-0.95) 4(1.2,-0.95) 5(1.2,0.95)
  silkscreen extent -1.32,-1.55 0.25,1.95, body extent -0.9,-1.55 0.9,1.55, height 1.19
MTC14_N [mm] "TSOP, 14-Leads, Body 5x4.4mm, Pitch 0.65mm, IPC Medium Density"
  oval 1.7x0.35 smd: 1(-2.85,1.95) 2(-2.85,1.3) 3(-2.85,0.65) 4(-2.85,0) 5(-2.85,-0.65) 6(-2.85,-1.3) 7(-2.85,-1.95) 8(2.85,-1.95) 9(2.85,-1.3) 10(2.85,-0.65) 11(2.85,0) 12(2.85,0.65) 13(2.85,1.3) 14(2.85,1.95)
  silkscreen extent -2.97,-2.55 1.6,2.8, body extent -2.25,-2.55 2.25,2.55, height 1.1
RESC2012M [mm] "Chip Resistor, Body 2.0x1.3mm, IPC Low Density"
  rect 1.4x1.5 smd: 1(-1,0) 2(1,0)
  silkscreen extent 0,-0.65 0,0.65, body extent -1.07,-0.7 1.07,0.7, height 0.65
"RESET SWITCH" [mm]
  rect 1.4x2.1 smd: 1(-2.25,4.55) 1(-2.25,-4.55) 2(2.25,4.55) 2(2.25,-4.55)
  silkscreen extent -3,-3 3,3
SOT95P285X145-6N [mm] "SOT23, 6-Leads, Body 3.0x3.0mm (max), Pitch 0.95mm, IPC Medium Density"
  rect 1.05x0.6 smd: 1(-1.225,0.95) 2(-1.225,0) 3(-1.225,-0.95) 4(1.225,-0.95) 5(1.225,0) 6(1.225,0.95)
  silkscreen extent -1.35,-1.5 0.3,1.92, body extent -0.85,-1.5 0.85,1.5, height 1.45
SOT-23_N [mm] "SOT23, 3-Leads, Body 2.9x1.3mm, Pitch 0.95mm, Lead Span 2.5mm, IPC Medium Density"
  rect 1.15x0.6 smd: 1(-1.125,0.95) 2(-1.125,-0.95) 3(1.125,0)
  silkscreen extent -1.25,-1.5 0.7,1.92, body extent -0.7,-1.5 0.7,1.5, height 1.1
"SSOP28 - MAX127" [mm] "SOP, 28-Leads, Body 10.3x5.4mm (max), Pitch 0.65mm, IPC Medium Density"
  oval 1.8x0.35 smd: 1(-3.425,4.225) 2(-3.425,3.575) 3(-3.425,2.925) 4(-3.425,2.275) 5(-3.425,1.625) 6(-3.425,0.975) 7(-3.425,0.325) 8(-3.425,-0.325) 9(-3.425,-0.975) 10(-3.425,-1.625) 11(-3.425,-2.275) 12(-3.425,-2.925) 13(-3.425,-3.575) 14(-3.425,-4.225) 15(3.425,-4.225) 16(3.425,-3.575) 17(3.425,-2.925) 18(3.425,-2.275) 19(3.425,-1.625) 20(3.425,-0.975) 21(3.425,-0.325) 22(3.425,0.325) 23(3.425,0.975) 24(3.425,1.625) 25(3.425,2.275) 26(3.425,2.925) 27(3.425,3.575) 28(3.425,4.225)
  silkscreen extent -3.55,-5.15 2.13,5.15, body extent -2.69,-5.17 2.69,5.17, height 1.99
TO152P1396X238-8N [mm] "D2-PAK, 8-Pads, Body 9.4x10.5mm (max), IPC Medium Density"
  rect 3.2x1 smd: 1(-6.25,3.81) 2(-6.25,2.54) 3(-6.25,1.27) 4(-6.25,0) 5(-6.25,-1.27) 6(-6.25,-2.54) 7(-6.25,-3.81)
  rect 8.382x10.65 smd: 4(4.445,0)
  silkscreen extent -6.37,-5.25 -0.4,5.75, body extent -3.95,-5.28 5.45,5.28, height 2.38
TO229P990X238-3N [mm] "D-PAK, 3-Pads, Body 6.2x6.7mm (max), IPC Medium Density"
  rect 3.05x1 smd: 1(-4.05,2.29) 1(-4.05,-2.29)
  rect 6.5x5.55 smd: 2(2.4,0)
  silkscreen extent -4.17,-3.35 -1.25,3.47, body extent -2.1,-3.37 4.12,3.37, height 2.38
TSOP65P640-14AN [mm] "TSOP, 14-Leads, Body 5x4.4mm, Pitch 0.65mm, IPC Medium Density"
  oval 1.7x0.35 smd: 1(-2.85,1.95) 2(-2.85,1.3) 3(-2.85,0.65) 4(-2.85,0) 5(-2.85,-0.65) 6(-2.85,-1.3) 7(-2.85,-1.95) 8(2.85,-1.95) 9(2.85,-1.3) 10(2.85,-0.65) 11(2.85,0) 12(2.85,0.65) 13(2.85,1.3) 14(2.85,1.95)
  silkscreen extent -2.97,-2.55 1.6,2.8, body extent -2.25,-2.55 2.25,2.55, height 1.2
TSSOP50P310X90-8N [mm] "TSSOP, 8-Leads, Body 2.1x2.4mm (max), Pitch 0.50mm, IPC Medium Density"
  oval 1.25x0.3 smd: 1(-1.325,0.75) 2(-1.325,0.25) 3(-1.325,-0.25) 4(-1.325,-0.75) 5(1.325,-0.75) 6(1.325,-0.25) 7(1.325,0.25) 8(1.325,0.75)
  silkscreen extent -1.45,-1.05 0.3,1.57, body extent -1.2,-1.05 1.2,1.05, height 0.9

## Part data
BAT BAT-TEMP LOAD: library part "Header 2", "Header, 2-Pin"
C1_X+ C1_X- C1_Y+ C1_Y- C1_Z+ C1_Z- C2_X+ C2_X- C2_Y+ C2_Y- C2_Z+ C2_Z- C3_X+ C3_X- C3_Y+ C3_Y- C3_Z+ C3_Z- C4_X+ C4_X- C4_Y+ C4_Y- C4_Z+ C4_Z- C5_X+ C5_X- C5_Y+ C5_Y- C5_Z+ C5_Z- C6_X+ C6_X- C6_Y+ C6_Y- C6_Z+ C6_Z- C7_X+ C7_X- C7_Y+ C7_Y- C7_Z+ C7_Z- C8_X+ C8_X- C8_Y+ C8_Y- C8_Z+ C8_Z- C9 C10 C11 C12 C13 C14 C15 C16 C17 C18 C19 C20 C21 C22 C23 C24 C25 C26 C27_A C27_B C28 C29 C30: "Capacitor"
D1_X+ D1_X- D1_Y+ D1_Y- D1_Z+ D1_Z- D2_X+ D2_X- D2_Y+ D2_Y- D2_Z+ D2_Z-: library part "Diode 11DQ03", "Schottky Rectifier"
D3: library part LED2, "Typical RED, GREEN, YELLOW, AMBER GaAs LED"
P1_X+ P1_X- P1_Y+ P1_Y- P1_Z+ P1_Z-: "Header, 4-Pin, Dual row"
P2: "Header, 12-Pin, Dual row"
P3: "Header, 8-Pin, Dual row"
P4: library part "Header 3X2", "Header, 3-Pin, Dual row"
P6: library part "Header 6H", "Header, 6-Pin, Right Angle"
P7: "Header, 2-Pin, Dual row"
Q1_X+ Q1_X- Q1_Y+ Q1_Y- Q1_Z+ Q1_Z-: library part MOSFET-N, "N-Channel MOSFET"
R1_X+ R1_X- R1_Y+ R1_Y- R1_Z+ R1_Z- R2_X+ R2_X- R2_Y+ R2_Y- R2_Z+ R2_Z- R3_X+ R3_X- R3_Y+ R3_Y- R3_Z+ R3_Z- R4_X+ R4_X- R4_Y+ R4_Y- R4_Z+ R4_Z- R5_X+ R5_X- R5_Y+ R5_Y- R5_Z+ R5_Z- R6_X+ R6_X- R6_Y+ R6_Y- R6_Z+ R6_Z- R7_X+ R7_X- R7_Y+ R7_Y- R7_Z+ R7_Z- R8_X+ R8_X- R8_Y+ R8_Y- R8_Z+ R8_Z- R9 R10 R12 R13 R14 R15 R16 R17 R19 R20 R21 R22 R23_A R23_B R24_A R24_B R25_A R25_B R26_A R26_B R27 R28 R29: "Resistor"
R11 R18: library part Res1, "Resistor"
S1: "Switch"
SOLAR_X+ SOLAR_X- SOLAR_Y+ SOLAR_Y- SOLAR_Z+ SOLAR_Z-: library part "Solar Panel Connector"
U1_X+ U1_X- U1_Y+ U1_Y- U1_Z+ U1_Z- U8 U11: "Current Sense Amplifer"
U2_X+ U2_X- U2_Y+ U2_Y- U2_Z+ U2_Z-: library part LT1513
U4: "8 Channel, 12 bit, I2C DAS"
U5 U9: "3 MHz, Micropower RRO Amplifier"
U10: "Precision Micropower Low Dropout Voltage Reference"
U12: library part ATmega8-16AC, "8-Bit AVR Microcontroller with 8K Bytes of In-System Programmable Flash Memory"
U14: library part PCA9306
X1: library part ECS-110-S-5P, "Crystal Oscillator"

## Via types
v1: diameter 0.5, hole 0.3, Top Layer to Bottom Layer, tented both sides, 205 vias
v2: diameter 0.5, hole 0.3, Top Layer to Bottom Layer, tented bottom, 114 vias
v3: diameter 0.8, hole 0.4, Top Layer to Bottom Layer, tented both sides, 103 vias
v4: diameter 1, hole 0.5, Top Layer to Bottom Layer, tented both sides, 77 vias
v5: diameter 0.4, hole 0.3, Top Layer to Bottom Layer, tented both sides, 18 vias

## Nets (pads, with @x,y where several pads share a name; then routed paths per layer and width w, separated by ;. In a path a pad name is that pad's centre, name@x,y a point inside that pad or via, vN(x,y) a via of type N, cw(c..) or ccw(c..) an arc to the next point about the centre after c; other vN are vias at no path point)
3V3: C4_X+.1 C4_X-.1 C4_Y+.1 C4_Y-.1 C4_Z+.1 C4_Z-.1 C11.2 C12.2 C16.2 C17.2 C18.2 C19.1 C20.1 C25.2 C29.2 C30.2 P3.1 P4.2 P6.4 R19.1 R20.1 R21.1 R27.1 R28.2 R29.2 U1_X+.3 U1_X-.3 U1_Y+.3 U1_Y-.3 U1_Z+.3 U1_Z-.3 U3.15 U3.19 U5.4 U6.15 U6.19 U7.6 U7.11 U7.16 U8.3 U9.4 U10.3 U10.4 U11.3 U12.4 U12.6 U12.18 U14.2 | length 387.7
  Top Layer w0.2: C12.2@154.175,115.85 157.9,115.85 158.475,115.275 U9.4@158.475,114 ; C18.2@154.175,124.7 154.247,124.628 154.247,122.296 155.671,120.872 157.947,120.872 v1(158.475,121.4) U5.4@158.475,122.75 ; v1(154.85,95.45) U10.3@154.85,96.625 ; U6.19@156.725,74.9 v1(158.4,74.9) 158.7,74.6 158.7,69.425 C16.2@158.75,69.375 ; U3.15@156.725,86.95 158.125,86.95 158.925,87.75 158.925,90.35 C11.2@158.8,90.475 ; U3.19@156.8,84.35 v1(158.025,84.35) ; U6.15@156.875,77.5 v1(158.1,77.5) ; v1(157.425,95.425) U10.4@157.425,96.6 ; U12.18@160.3,105.1 v1(162.025,105.1) ; U7.16@162.502,123.917 162.502,123.123 162.727,122.898 165.677,122.898 ; U7.6@165.677,118.583 165.677,121.103 v1@166.575,122 ; U7.11@165.677,123.917 165.677,122.898 ; v1(167.725,104.3) U12.6@169.45,104.3 ; v1(167.8,102.7) U12.4@169.525,102.7 ; C17.2@168.975,122 v1(166.6,122) v1@166.575,122 ; v1(169.375,71.5) R19.1@171.1,71.5 ; v1(169.375,74) R20.1@171.1,74 ; v1(169.375,76.5) R29.2@171.1,76.5 ; v1(169.375,79) R28.2@171.1,79 ; U14.2@175.925,119.475 v1(175.925,120.825) ; 165.677,122.898 v1@166.575,122
  Top Layer w0.4: C19.1@15.975,102.425 17.575,100.825 19.775,100.825 ; U8.3@20.15,102.05 20.15,101.2 19.775,100.825 ; C20.1@20.425,95.65 21.7,95.65 22,95.95 22,99.4 21.725,99.675 U11.3@20.625,99.675 20.625,99.975 19.775,100.825 ; U1_Y-.3@31.951,145.187 33.216,145.187 v3(33.266,145.237) 33.824,144.679 C4_Y-.1@34.79,144.679 ; C4_Z+.1@50.21,70.321 51.176,70.321 v3(51.734,69.763) 51.784,69.813 U1_Z+.3@53.049,69.813 ; U1_X-.3@74.951,145.187 76.216,145.187 v3(76.266,145.237) 76.824,144.679 C4_X-.1@77.79,144.679 ; C4_X+.1@93.21,70.321 94.176,70.321 v3(94.734,69.763) 94.784,69.813 U1_X+.3@96.049,69.813 ; U1_Z-.3@117.951,145.187 119.216,145.187 v3(119.266,145.237) 119.824,144.679 C4_Z-.1@120.79,144.679 ; C4_Y+.1@136.21,70.321 137.176,70.321 v3(137.734,69.763) 137.784,69.813 U1_Y+.3@139.049,69.813
  Top Layer w0.5: v3(18.416,93.513) 19.103,94.2 20.1,94.2 20.425,94.525 C20.1@20.425,95.65
  Bottom Layer w0.2: C25.2@164.15,104.45 164.15,104.376 164.175,104.351 v1(164.175,103.15) ; R27.1@170,65 v1(170,66.725) ; v1(174.4,85) R21.1@176,85
  Bottom Layer w0.5: v3@18.4,93.575 18.4,78.275 23.275,73.4 48.097,73.4 v3(51.734,69.763) 63.713,69.763 67.425,73.475 90.725,73.475 94.437,69.763 v3(94.734,69.763) 106.688,69.763 110.575,73.65 133.847,73.65 v3(137.734,69.763) v3@152.5,69.763 ; v3(33.266,145.237) 36.853,141.65 65.975,141.65 69.562,145.237 v3(76.266,145.237) 79.803,141.7 110.075,141.7 113.612,145.237 v3(119.266,145.237) 122.678,141.825 v3@152.75,141.825
  Bottom Layer w0.8: C30.2@156.55,66 C29.2@159.45,66
  other v1: 157.875,115.8
  other v3: 158,66 152.516,69.737 152.7,141.8
5V0: C10.2 C27_A.2 C27_B.2 P3.2 R14.1 R15.1 R22.1 R23_A.1 R23_B.1 R24_A.1 R24_B.1 R25_A.1 R25_B.1 R26_A.1 R26_B.1 U4.1 U4.2 U4.13 U13_A.3 U13_A.4 U13_A.5 U13_A.10 U13_A.12 U13_B.3 U13_B.4 U13_B.5 U13_B.10 U13_B.12 | length 120.8
  Top Layer w0.2: R24_B.1@155.075,134.7 R23_B.1@155.075,137.8 ; R24_A.1@155.075,145.225 R23_A.1@155.075,148.325 ; U13_B.3@159.375,136.9 U13_B.5@159.375,135.6 159.4,135.575 161.375,135.575 v1(161.625,135.325) 161.625,132.525 C27_B.2@161.25,132.15 ; U13_A.3@159.375,147.425 U13_A.5@159.375,146.125 159.4,146.1 161.375,146.1 v1(161.625,145.85) 161.625,143.05 C27_A.2@161.25,142.675 ; v1(163.725,135.6) U13_B.10@165.075,135.6 ; v1(163.725,146.125) U13_A.10@165.075,146.125 ; v1(163.75,137.2) 164.05,136.9 U13_B.12@165.075,136.9 ; v1(163.75,147.725) 164.05,147.425 U13_A.12@165.075,147.425 ; R25_B.1@169.375,134.7 R26_B.1@169.375,137.8 ; R25_A.1@169.375,145.225 R26_A.1@169.375,148.325 ; v1(170.375,131.175) 170.375,127.45 R22.1@173.25,124.575 ; v1(177.6,143.55) U4.13@178.95,143.55 ; v1(178.175,135.75) U4.1@179.525,135.75 ; C10.2@179.35,133.325 179.35,136.275 U4.2@179.475,136.4 ; R14.1@181.6,141.25 v1(183.325,141.25) ; v1(183.375,143.325) R15.1@185.1,143.325
  Top Layer w0.5: P3.2@181.585,66.9 179.975,68.51 179.975,85.6 184.3,89.925 184.3,106.1 180.075,110.325 180.075,125.075 184.75,129.75 v3(184.75,132.5)
  other v1: 169.375,136.25 155.075,136.3 169.375,146.775 155.075,146.825
  other v3: 184.75,131.5
ADC_A_S\S\: U3.6 U3.10 U12.13 | length 35
  Top Layer w0.2: U3.6@163.275,84.35 164.275,84.35 164.55,84.625 v1(164.55,86.95) U3.10@163.275,86.95 ; U12.13@164.465,107.696 v1(164.465,108.712) ; v1(169.575,94.375) 169.575,95.525 172.325,98.275 v1(172.325,102.925)
  Bottom Layer w0.2: 164.475,107.625 165.125,106.975 168.128,106.975 172.178,102.925 v1(172.325,102.925) ; v1(164.55,86.95) 164.55,89.35 v1(169.575,94.375)
ADC_B_S\S\: U6.6 U6.10 U12.14 | length 45.9
  Top Layer w0.2: U6.6@163.275,74.9 164.475,74.9 164.75,75.175 164.75,77.475 ; U6.10@163.275,77.5 163.3,77.475 164.75,77.475 ; U12.14@163.7,107.325 v1@163.7,108.55 ; v1@164.725,91.85 165.15,91.425 165.15,82.175 164.75,81.775 164.75,77.475 ; v1(168.925,95.975) 171.45,98.5 v1(171.45,102.875)
  Bottom Layer w0.2: v1@163.7,108.55 163.7,107.475 164.6,106.575 167.75,106.575 v1(171.45,102.875) ; v1(164.75,91.8) v1(168.925,95.975)
  other v1: 163.703,108.712
BAT: BAT.1 P2.13 P2.15 P2.17 P2.19 P2.21 P2.23 R11.2 R18.2 U8.5 U11.4 | length 37.2
  Top Layer w0.4: R18.2@16,99.65 U11.4@18.225,99.65 ; U8.5@19.175,104.6 R11.2@19.175,106.825
  Top Layer w1.4: P2.13@13,100.24 13.66,100.24 14.2,99.7 R18.2@15.925,99.7 ; 13,106.875 13.025,106.9 18.875,106.9 R11.2@18.9,106.875
  Top Layer w2.2: P2.13@13,100.24 P2.15@13,102.78 P2.17@13,105.32 13,106.875 P2.19@13,107.86 P2.21@13,110.4 P2.23@13,112.94 13,118.2 14,119.2 BAT.1@14,123.46